# EAGLE board Vibrodroid (EAGLE 6.4)

Size 160 x 100 mm. Coordinates in mm from the lower left corner, seen from the top.
Outline: 0,0 160,0 160,100 0,100 0,0
Copper layers (1*16): Top 0.035mm / dielectric 1.5mm / Bottom 0.035mm
Design rules "default": minimum track width 10mil, minimum drill 24mil, track to track 8mil, track to pad 8mil, pad to pad 8mil, via to via 8mil, smd to smd 8mil, copper to edge 40mil, drill to drill 8mil, minimum pad ring 10mil, minimum via ring 8mil, stop-mask expansion 4mil, vias tented up to drill 0mil, thermal gap 10mil
Net classes: 0 default: width 0.254 mm, clearance 0.254 mm; 1 power: width 0.61 mm, drill 0.61 mm, clearance 0.254 mm; 2 gnd: width 0.305 mm, drill 0.559 mm, clearance 0.254 mm; 3 usbvcc: width 0.508 mm, drill 0.61 mm, clearance 0.254 mm; 4 aref: width 0.406 mm, drill 0.61 mm, clearance 0.254 mm

## Footprints (pad centres in the part's own frame; a part is rotated, then mirrored left to right if it is on the bottom)
C2.5-6 = drill 0.813 pad 1.6 octagon: 1 -1.27,0; 2 1.27,0
C2.5-4 = drill 0.813 pad 1.6 octagon: 1 -1.27,0; 2 1.27,0
1X03 = drill 1.016 long: 1 -2.54,0; 2 0,0; 3 2.54,0
1X02 = drill 1.016 long: 1 -1.27,0; 2 1.27,0
LED5MM = drill 0.813 octagon: A -1.27,0; K 1.27,0
PHOTOCELL = drill 0.8 pad 1.676: 1 -2,0; 2 2,0
0207/10 = drill 0.813 octagon: 1 -5.08,0; 2 5.08,0
DIL28-3 = drill 0.85 pad 1.422 long: 1 -16.51,-3.81; 2 -13.97,-3.81; 3 -11.43,-3.81; 4 -8.89,-3.81; 5 -6.35,-3.81; 6 -3.81,-3.81; 7 -1.27,-3.81; 8 1.27,-3.81; 9 3.81,-3.81; 10 6.35,-3.81; 11 8.89,-3.81; 12 11.43,-3.81; 13 13.97,-3.81; 14 16.51,-3.81; 15 16.51,3.81; 16 13.97,3.81; 17 11.43,3.81; 18 8.89,3.81; 19 6.35,3.81; 20 3.81,3.81; 21 1.27,3.81; 22 -1.27,3.81; 23 -3.81,3.81; 24 -6.35,3.81; 25 -8.89,3.81; 26 -11.43,3.81; 27 -13.97,3.81; 28 -16.51,3.81

## Placement (x,y rotation side)
C1  [C2.5-6]  59.05,59.69 0 top
C2  [C2.5-6]  80.01,31.75 0 top
C6  100n  [C2.5-4]  105.41,29.21 0 top
JP1  [1X03]  69.22,50.8 270 top
JP2  [1X02]  110.49,49.53 270 top
JP3  [1X02]  69.85,66.04 270 top
LED5  [LED5MM]  57.15,74.93 180 top
LED6  [LED5MM]  105.41,72.39 90 top
R2  PHOTOCELLPTH  [PHOTOCELL]  92.71,49.53 90 top
R3  10k  [0207/10]  66.04,26.67 180 top
R4  10k  [0207/10]  66.04,33.02 180 top
R5  PHOTOCELLPTH  [PHOTOCELL]  62.23,49.53 90 top
R6  [0207/10]  99.06,55.88 90 top
R7  [0207/10]  91.44,29.21 90 top
ZU4  ATMEGA328P-PU  [DIL28-3]  81.28,55.88 270 top

## Library data of the parts
C1 C2 C6 = capacitor-wima
JP1-JP3 = pinhead
LED5 LED6 = led
R2 R5 = SparkFun
R3 R4 R7 = rcl
R6 = resistor
ZU4 = SmartPrj

## Nets
A3: R2.1 R3.2 ZU4.26
A4: R4.2 R5.1 ZU4.27
AREF [aref]: ZU4.21
D13: R6.1 ZU4.19
GND [gnd]: C1.1 C2.1 C6.1 JP2.1 LED5.K LED6.K R2.2 R5.2 ZU4.8 ZU4.22
N$2 [usbvcc]: C6.2 ZU4.7 ZU4.20
N$7: LED5.A R6.2
N$8: LED6.A R7.2
RX: JP3.1 ZU4.2
TX: JP3.2 ZU4.3
VCC: JP2.2 R3.1 R4.1 R7.1
XTAL1: C2.2 JP1.1 ZU4.9
XTAL2: C1.2 JP1.3 ZU4.10

## Tracks (layer width: path | path; a pad name or v marks a point on that pad's centre or on a via)
A3  (2 unrouted)
A4  (2 unrouted)
D13  (1 unrouted)
GND  (9 unrouted)
N$2  (2 unrouted)
N$7  (1 unrouted)
N$8  (1 unrouted)
RX  (1 unrouted)
TX  (1 unrouted)
VCC  (3 unrouted)
XTAL1  (2 unrouted)
XTAL2  (2 unrouted)